# Altium PCB VYLT_IOT_BATTPACK.PcbDoc
Units mm, origin at the board's own origin, x right, y up, seen from the top; angles counter-clockwise.
Board outline 137.1 x 87.1 mm, 2 copper layers (L1, L2), stack 1.58 mm thick; 45 components, 30 nets, 165 pads, 54 vias.
Unrouted connection lines stored in the file: 6.
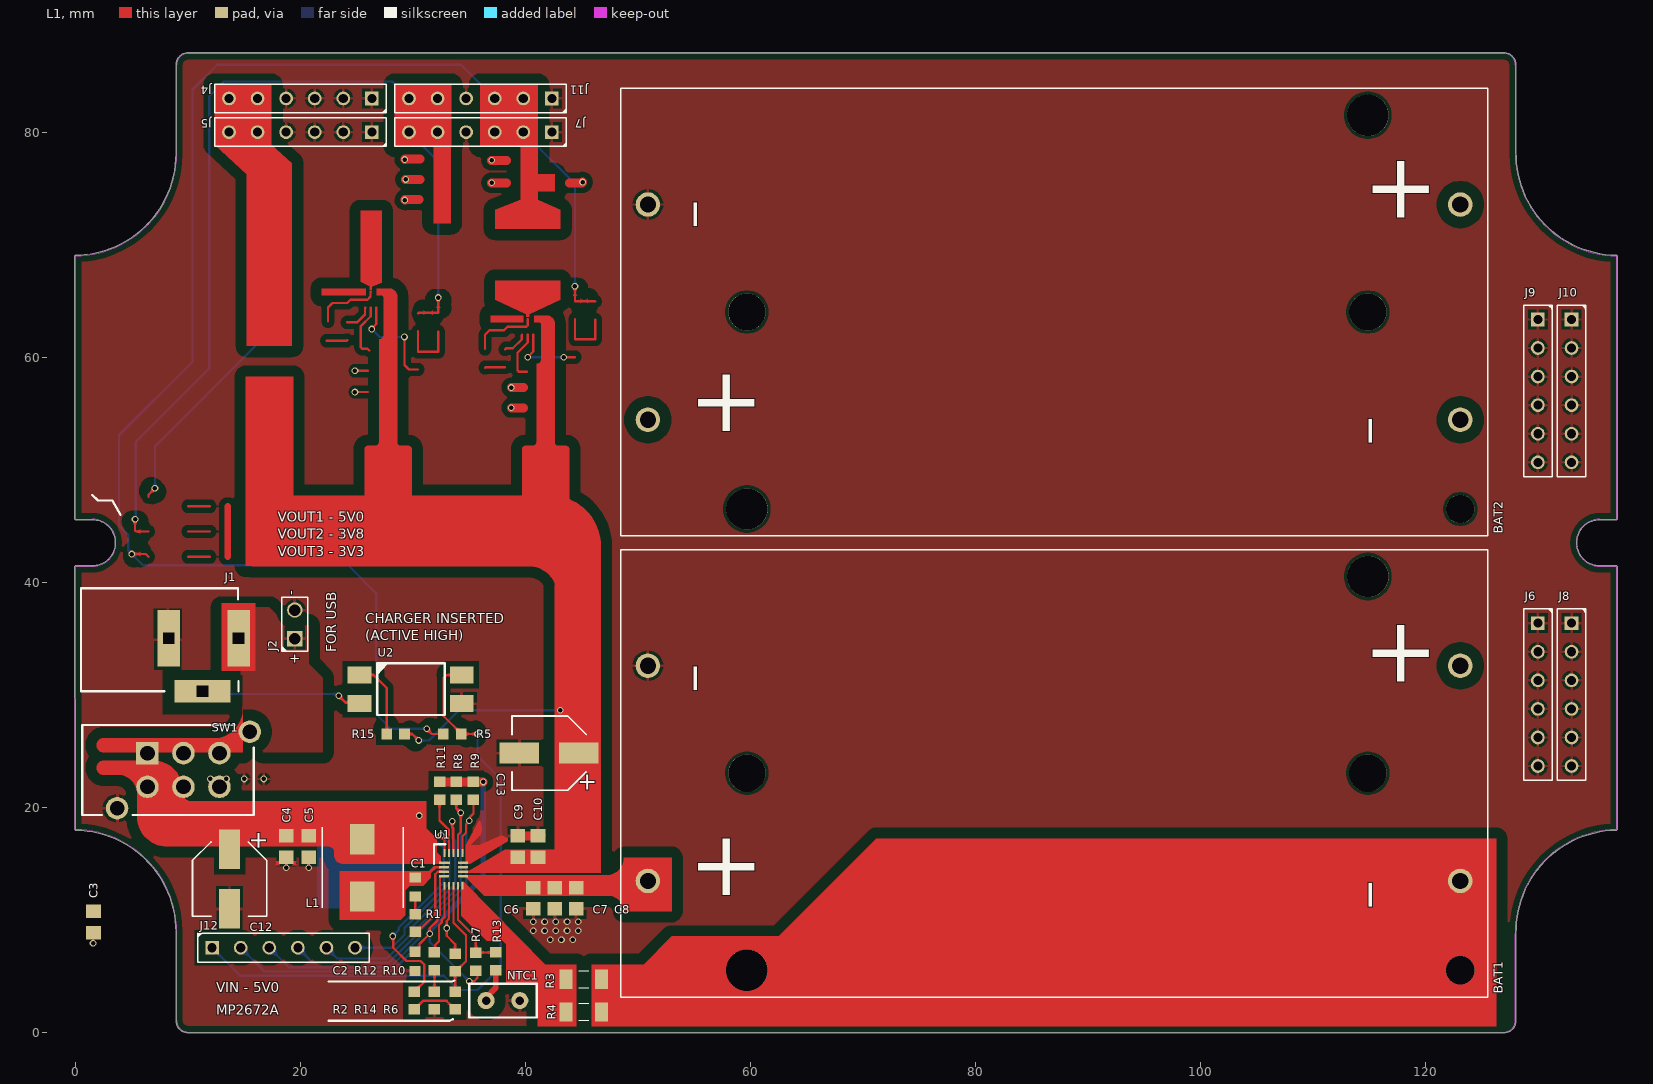
[diagram p0: L1 view]
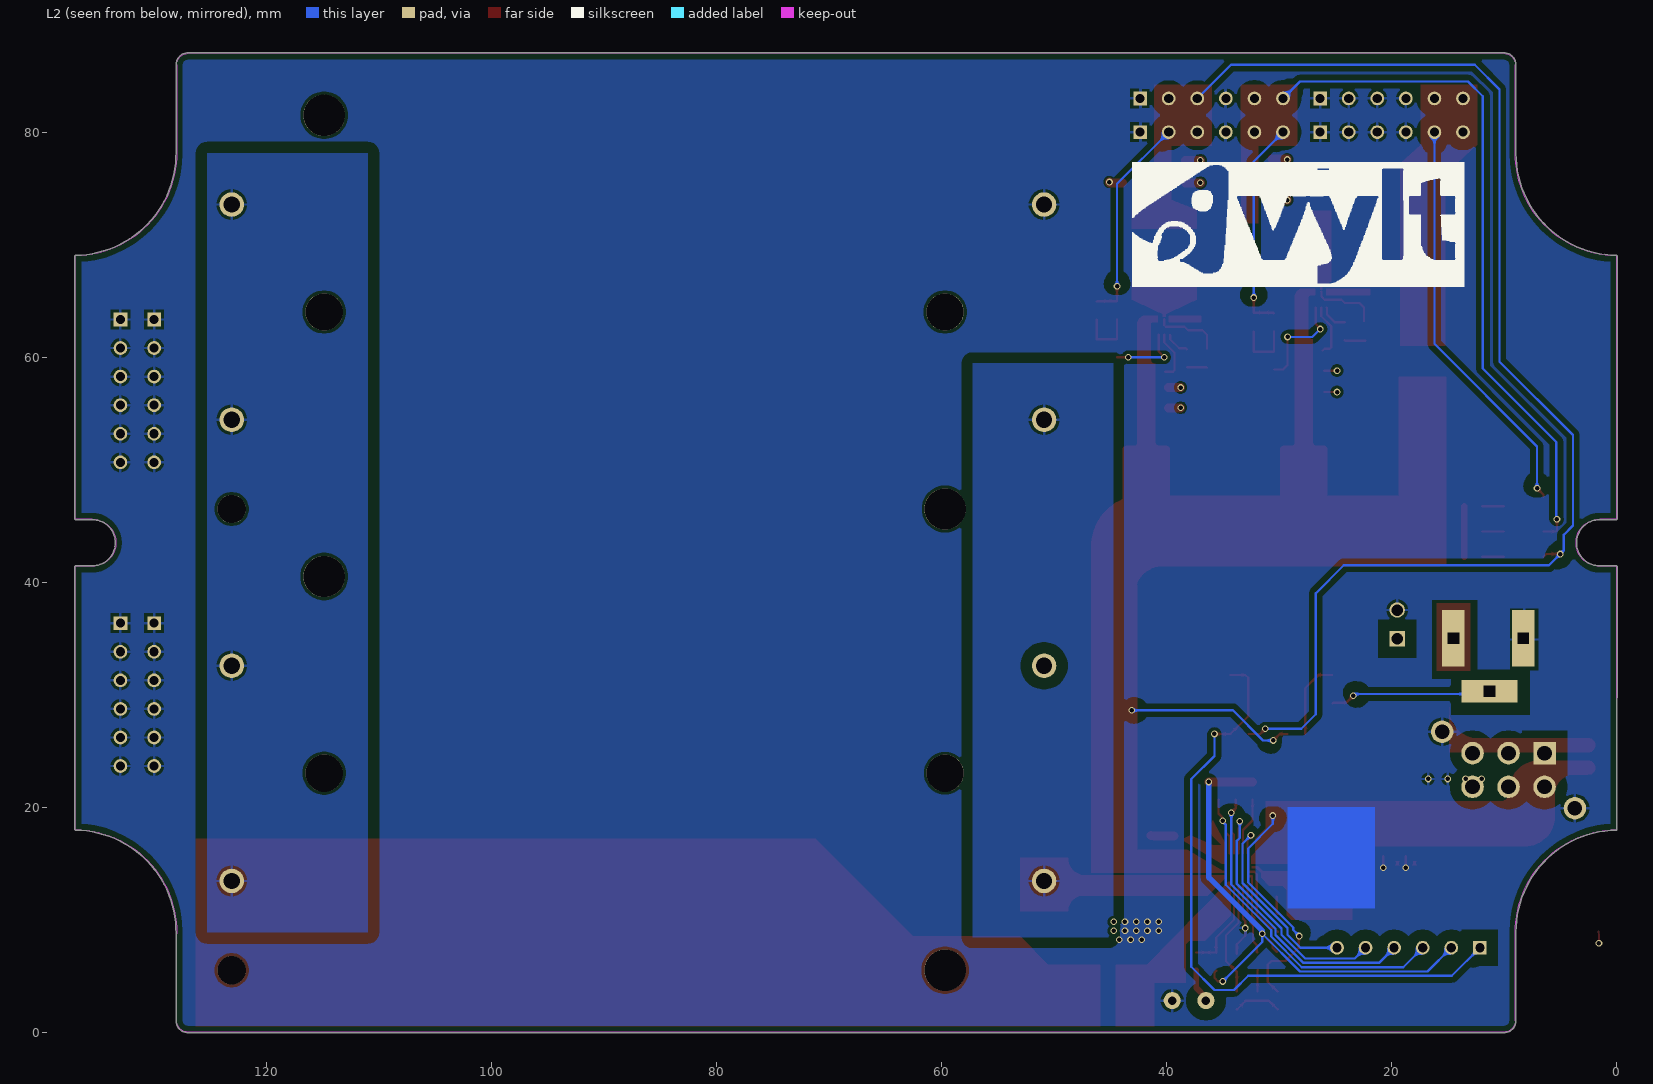
[diagram p1: L2 view, seen from below]
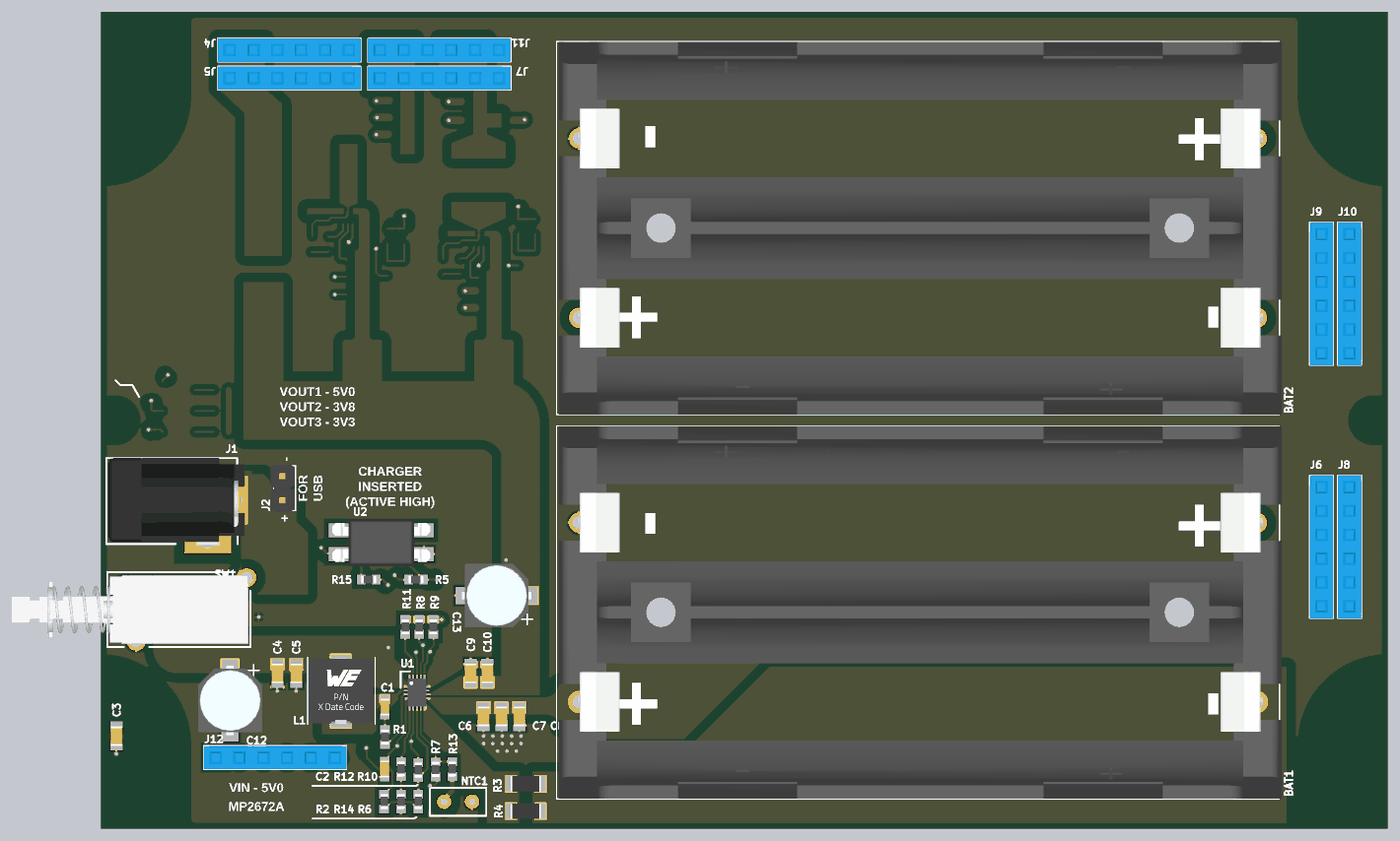
[diagram p2: 3D render of the assembled board from above, using the file's embedded part models]

## Layer stack, top to bottom
Top Solder: solder mask 0.01, Solder Resist, Dk 3.5
L1: signal copper 0.035
Dielectric 1: core 1.51, FR-4, Dk 4
L2: signal copper 0.035
Bottom Solder: solder mask 0.01, Solder Resist, Dk 3.5

## Board outline
-0.004,17.95 -0.05,41.4 0,41.45 1.5,41.45 ccw(c1.5,43.5) 3.55,43.5 ccw(c1.5,43.5) 1.5,45.55 0,45.55 -0.053,45.603 -0.053,69 -0.004,69.05 ccw(c-0.126,78.123) 8.947,78.124 8.947,78.247 8.947,85.997 8.95,86.014 cw(c10,86) 10,87.05 127,87.05 cw(c127,86) 128.05,86.014 128.053,85.997 128.054,78.247 ccw(c137.126,78.123) 137.003,69.051 137.05,68.983 137.05,45.6 137,45.55 135.5,45.55 ccw(c135.5,43.5) 135.5,41.45 137,41.45 137.05,41.4 137.05,18.017 137.004,17.95 ccw(c137.126,8.877) 128.053,8.754 128.053,1.003 128.05,0.986 cw(c127,1) 127,-0.05 10,-0.05 cw(c10,1) 8.95,0.986 8.947,1.003 8.947,8.753 8.947,8.877 ccw(c-0.126,8.877)

## Design rules (kind name [scope] priority, off if disabled: settings)
Clearance [All] p1: gap=0.254 ignorepadtopadclearanceinfootprint=FALSE except(0.178: Track-Track Track-SMDPad SMDPad-SMDPad; 0.5: Arc-Poly Track-Poly SMDPad-Poly; 1: THPad-Poly Poly-Poly Poly-Region)
Height [All] p1: minheight=0 maxheight=55 prefheight=12.7
PolygonConnect [All] p1: connectstyle=Relief reliefconductorwidth=0.254 reliefentries=4 polygonreliefangle="90 Angle" airgapwidth=0.254
RoutingVias [All] p1: holewidth=0.711 width=1.27 viastyle="Through Hole" minholewidth=0.1 minwidth=0.1 maxholewidth=0.711 maxwidth=1.27
SolderMaskExpansion [All] p1: expansion=0.102 istentingtop=FALSE
SupplyNets "Schematic Supply Nets_8" [InNet('5V0')] p1: voltage=0.000
SupplyNets "Schematic Supply Nets_12" [InNet('3V8')] p2: voltage=0.000
SupplyNets "Schematic Supply Nets_11" [InNet('PACK_P')] p3: voltage=0.000
SupplyNets "Schematic Supply Nets_7" [InNet('MP2672_LDO')] p4: voltage=0.000
SupplyNets "Schematic Supply Nets_5" [InNet('MP2672_VOUT')] p5: voltage=0.000
SupplyNets "Schematic Supply Nets_3" [InNet('3V3')] p6: voltage=0.000
SupplyNets "Schematic Supply Nets_2" [InNet('VCC')] p7: voltage=0.000
SupplyNets "Schematic Supply Nets" [InNet('VIN')] p8: voltage=0.000
SupplyNets "Schematic Supply Nets_1" [InNet('GND')] p9: voltage=0.000
Width [All] p1: maxlimit=5 minlimit=0.178 preferedwidth=0.5
29 further rules are at their usual default settings.

## Classes and differential pairs
net class J11_Nets: 3V3 3V8 GND
net class J7_Nets: 3V3 3V8 GND
net class J12_Nets: ADAP_DET_LV MP2672_LDO MP2672_NACK MP2672_NSTAT MP2672_SCL MP2672_SDA
net class J4_Nets: 5V0 GND
net class J10_Nets: GND
net class J9_Nets: GND
net class J5_Nets: 5V0 GND
net class J8_Nets: GND
net class J6_Nets: GND
net class C13_Nets: GND MP2672_VOUT
net class U2_Nets: ADAP_DET_HV ADAP_DET_LV GND NetR15_2
net class R15_Nets: MP2672_VOUT NetR15_2
net class R5_Nets: 3V3 ADAP_DET_LV
net class R2_Nets: NetR2_1 VCC
net class SW1_Nets: GND NetSW1_1 NetSW1_4 VCC VIN
net class J2_Nets: GND VIN
net class C3_Nets: GND VCC
net class J1_Nets: ADAP_DET_HV GND VIN
net class C12_Nets: GND VCC
net class U1_Nets: GND MP2672_LDO MP2672_NACK MP2672_NSTAT MP2672_SCL MP2672_SDA MP2672_VOUT NetC1_2 NetR1_2 NetR3_2 NetR6_1 NetR7_2 NetR11_2 NetR12_2 PACK_P VCC
net class R14_Nets: GND NetR12_1
net class R13_Nets: NetNTC1_2 NetR7_2
net class R12_Nets: NetR12_1 NetR12_2
net class R11_Nets: MP2672_LDO NetR11_2
net class R10_Nets: GND NetR6_1
net class R9_Nets: MP2672_LDO MP2672_SCL
net class R8_Nets: MP2672_LDO MP2672_SDA
net class R7_Nets: MP2672_LDO NetR7_2
net class R6_Nets: NetR2_1 NetR6_1
net class R4_Nets: NetR3_2 PACK_MID
net class R3_Nets: NetR3_2 PACK_MID
net class R1_Nets: NetC1_1 NetR1_2
net class NTC1_Nets: GND NetNTC1_2
net class L1_Nets: NetC1_2 VCC
net class C10_Nets: GND MP2672_VOUT
net class C9_Nets: GND MP2672_VOUT
net class C8_Nets: GND PACK_P
net class C7_Nets: GND PACK_P
net class C6_Nets: GND PACK_P
net class C5_Nets: GND VCC
net class C4_Nets: GND VCC
net class C2_Nets: GND MP2672_LDO
net class C1_Nets: NetC1_1 NetC1_2
net class BAT2_Nets: GND PACK_MID PACK_P
net class BAT1_Nets: GND PACK_MID PACK_P

## Components (designator, comment, footprint, x,y, rotation, side; value= is the part's Value field where it differs from the comment)
BAT1 "1049" 1049 87,23 r0 top locked
BAT2 "1049" 1049 87,64 r0 top locked
C1 "MLCC_0603" CAPC1608X10N 30.2,12.9 r90 top value=0.1uF
C2 "MLCC_0603" CAPC1608X10N 30.177,6.29 r270 top value=0.1uF
C3 "MLCC_0805" CAPC2012X13L 1.6,9.8 r270 top value=22uF
C4 "MLCC_0805" CAPC2012X13L 18.75,16.5 r270 top value=1uF
C5 "MLCC_0805" CAPC2012X13L 20.75,16.5 r270 top value=100nF
C6 "MLCC_0805" CAPC2012X13L 40.7,11.9 r270 top value=22uF
C7 "MLCC_0805" CAPC2012X13L 42.611,11.9 r270 top value=1uF
C8 "MLCC_0805" CAPC2012X13L 44.515,11.9 r270 top value=100nF
C9 "MLCC_0805" CAPC2012X13L 39.33,16.5 r90 top value=10uF
C10 "MLCC_0805" CAPC2012X13L 41.115,16.5 r90 top value=1uF
C12 "ERP_102-2" CAP_6.3_7.7 13.7,13.6 r270 top value=100uF
C13 "ERP_102-2" CAP_6.3_7.7 42.1,24.8 r180 top value=100uF
J1 "KLDX-0202-AC" KLDX-0202-AC 14.5,35 r0 top locked value=NA
J2 "2PX1R" 2PX1R 19.5,36.25 r90 top
J4 "ERP_148-2" 6PX1R_F 20,83 r0 top locked
J5 "ERP_148-2" 6PX1R_F 20,80 r0 top locked
J6 "ERP_148-2" 6PX1R_F 130,30 r90 top locked
J7 "ERP_148-2" 6PX1R_F 36,80 r0 top locked
J8 "ERP_148-2" 6PX1R_F 133,30 r90 top locked
J9 "ERP_148-2" 6PX1R_F 130,57 r90 top locked
J10 "ERP_148-2" 6PX1R_F 133,57 r90 top locked
J11 "ERP_148-2" 6PX1R_F 36,83 r0 top locked
J12 "ERP_148-2" 6PX1R_F 18.5,7.5 r180 top locked
L1 "IND_7040" IND_7040 25.501,14.606 r0 top value=1.5uH
NTC1 "RES_NTC_BEAD" RES_NTC_BEAD 39.5,2.8 r180 top value=10kNTC
R1 "ERP_101-1" RES_0603 30.2,9.7 r270 top value=0R
R2 "ERP_101-1" RES_0603 30.105,2.815 r90 top value=10R
R3 "ERP_101-1" RESC3115X06N 45.2,4.7 r180 top value=20R
R4 "ERP_101-1" RESC3115X06N 45.2,1.8 r180 top value=20R
R5 "ERP_101-1" RES_0603 33.5,26.5 r180 top value=1k
R6 "ERP_101-1" RES_0603 33.756,2.815 r270 top value=27k4
R7 "ERP_101-1" RES_0603 35.594,6.25 r90 top value=12k7
R8 "ERP_101-1" RES_0603 33.852,21.455 r270 top value=10k
R9 "ERP_101-1" RES_0603 35.349,21.455 r270 top value=10k
R10 "ERP_101-1" RES_0603 33.756,6.18 r270 top value=10k
R11 "ERP_101-1" RES_0603 32.365,21.455 r270 top value=1k
R12 "ERP_101-1" RES_0603 31.913,6.29 r90 top value=6k04
R13 "ERP_101-1" RES_0603 37.368,6.29 r90 top value=3k74
R14 "ERP_101-1" RES_0603 31.913,2.815 r90 top value=6k04
R15 "ERP_101-1" RES_0603 28.46,26.5 r180 top value=220R
SW1 "ERP_110-4" PBH2U 9.6,23.3 r270 top
U1 "MP2672AGD" MP2672AGD 33.615,14.455 r0 top locked
U2 "FOD817A3SD" FOD817A3SD 29.8,30.48 r0 top

## Footprints (in the part's own frame and the unit in brackets; to place one, negate y for a bottom-side part, rotate by r counter-clockwise, add the part's x,y. Pads: shape width x height; smd on the part's side, far side on the other; paste and mask are expansions set on the pad)
2PX1R [mm]
  rect 1.37x1.37 hole 1.02: 1(-1.27,0)
  round 1.37 hole 1.02: 2(1.27,0)
  silkscreen extent -2.39,-1.17 2.39,1.17, body extent -2.54,-1.04 2.54,1.5, height 8.77
6PX1R_F [mm]
  rect 1.22x1.22 / inner round 1.22 / far side rect 1.22x1.22 hole 0.81: 1(6.35,0)
  round 1.22 hole 0.81: 2(3.81,0) 3(1.27,0) 4(-1.27,0) 5(-3.81,0) 6(-6.35,0)
  silkscreen extent -7.62,-1.27 7.62,1.27, body extent -7.62,-1.27 7.62,1.27, height 8.51
1049 [mm] "BATT HOLDER 18650 2 CELL PC PIN"
  round 2.175 hole 1.45: 1(-36.11,9.565) 2(36.11,9.565) 3(-36.11,-9.565) 4(36.11,-9.565)
  round 3.68 hole 3.68 unplated: ""(-27.31,-17.5) ""(27.89,17.5)
  round 3.31 hole 3.31 unplated: ""(-27.31,0.015) ""(27.89,0.015)
  round 2.51 hole 2.51 unplated: ""(36.11,-17.5)
  silkscreen extent -38.53,-19.89 38.53,19.89, body extent -38.3,-19.88 38.76,19.89, height 14.91
CAP_6.3_7.7 [mm]
  rect 3.5x1.85 smd: 1(-2.65,0) 2(2.65,0)
  silkscreen extent -3.3,-3.3 3.3,3.3, body extent -3.7,-3.4 3.7,3.4, height 8
CAPC1608X10N [mm] "Chip Capacitor, 2-Leads, Body 1.60x0.80mm, IPC Medium Density"
  rect 0.9x1 smd: 1(-0.85,0) 2(0.85,0)
  body extent -0.9,-0.5 0.9,0.5, height 1
CAPC2012X13L [mm] "Chip Capacitor, 2-Leads, Body 2.00x1.25mm, IPC High Density"
  rect 1.2x1.3 smd: 1(-0.95,0) 2(0.95,0)
  body extent -1.05,-0.63 1.05,0.63, height 1.26
FOD817A3SD [mm]
  rect 2.1x1.5 smd: 1(-4.55,1.27) 2(-4.55,-1.27) 3(4.55,-1.27) 4(4.55,1.27)
  silkscreen extent -3,-2.3 3.03,2.3, body extent -5.23,-2.57 5.23,2.53, height 3.84
IND_7040 [mm]
  rect 2.2x2.7 smd: 1(0,2.55) 2(0,-2.55)
  silkscreen extent -3.55,-3.55 3.65,3.6, body extent -3.45,-3.5 3.45,3.5, height 4
KLDX-0202-AC [mm] "CONN PWR JACK 2X5.5MM KINKED PIN"
  rect 2x5 hole 1 square: 1(0,0) 2(-6.2,0)
  rect 5x2 hole 1 square: 3(-3.2,-4.7)
  silkscreen extent -14,-4.7 0,4.45, body extent -13.75,-5 0.75,4.5, height 10.85
MP2672AGD [mm]
  rect 1x0.2 smd: 1(-0.8,0.6)
  rect 0.9x0.2 smd: 2(-0.85,0.2) 3(-0.85,-0.2) 4(-0.85,-0.6) 10(0.85,-0.6) 11(0.85,-0.2) 12(0.85,0.2) 13(0.85,0.6)
  rect 0.2x0.7 smd: 5(-0.8,-1.45) 6(-0.4,-1.45) 7(0,-1.45) 8(0.4,-1.45) 9(0.8,-1.45) 14(0.8,1.45) 15(0.4,1.45) 16(0,1.45) 17(-0.4,1.45) 18(-0.8,1.45)
  silkscreen extent -1.75,0.5 -0.75,2.25, body extent -1,-1.5 1,1.5, height 0.87
PBH2U [mm]
  rect 2x2 hole 1.3: 1(-1.5,-3.2)
  round 2 hole 1.3: 2(-1.5,0) 3(-1.5,3.2) 4(1.5,-3.2) 5(1.5,0) 6(1.5,3.2) 7(3.4,-5.9) 8(-3.4,5.9)
  silkscreen extent -4,-9 4,6.25, body extent -3.65,-19.2 3.65,6, height 9.15
RES_0603 [mm]
  rect 0.94x1.02 smd: 1(-0.79,0) 2(0.79,0)
  body extent -0.8,-0.4 0.8,0.4, height 0.45
RES_NTC_BEAD [mil] "THERMISTOR NTC"
  round 60 hole 30: 1(0,0) 2(118.11,0)
  silkscreen extent -59,-59 177,59
RESC3115X06N [mm] "Chip Resistor, 2-Leads, Body 3.10x1.55mm, IPC Medium Density"
  rect 1.15x1.7 smd: 1(-1.575,0) 2(1.575,0)
  silkscreen extent -0.45,-0.75 0.45,0.75, body extent -1.6,-0.82 1.6,0.82, height 0.65

## Part data
BAT1 BAT2: "BATT HOLDER 18650 2 CELL PC PIN", Manufacturer 1="Keystone Electronics", Manufacturer Part Number 1=1049
C1 C2: "Chip Capacitor, 2-Leads, Body 1.60x0.80mm, IPC Medium Density", Package=0603
C3 C4 C5 C6 C7 C8 C9 C10: "Chip Capacitor, 2-Leads, Body 2.00x1.25mm, IPC High Density", Package=0805
C12 C13: library part CAP_6.3_7.7, "Electrolytic Capacitor SMD 6.3x7.7", Package=6.3x7.7, ERP=1
J1: "CONN PWR JACK 2X5.5MM KINKED PIN", Manufacturer 1=Sharvi, Manufacturer Part Number 1=ST2001CO0701
J4 J5 J6 J7 J8 J9 J10 J11 J12: library part 6PX1R_F, "6PX1R Female Header"
L1: Manufacturer 1="Würth Elektronik", Manufacturer Part Number 1=744311150
NTC1: "THERMISTOR NTC", Manufacturer 1="Eaton - Electronics Division", Manufacturer Part Number 1=NRG1104F3435B2F
R1 R2 R5 R6 R7 R8 R9 R10 R11 R12 R13 R14 R15: library part RES_0603, "RES_0603", Package=0603
R3 R4: library part RES_1206, "RES_0805", Package=1206
SW1: library part PBH2U, "Pushbutton Switch DPDT Standard Through Hole, Right Angle", Manufacturer 1=Sharvi, Manufacturer Part Number 1=ST2106CO3161
U1: "2-CELL 2A BOOST CHARGER WITH NVD", Manufacturer 1="Monolithic Power Systems Inc."
U2: "OPTOISOLATOR 5KV TRANSISTOR 4SMD"

## Via types
v1: diameter 0.6, hole 0.4, L1 to L2, tented both sides, 54 vias

## Nets (pads, with @x,y where several pads share a name; then routed paths per layer and width w, separated by ;. In a path a pad name is that pad's centre, name@x,y a point inside that pad or via, vN(x,y) a via of type N, cw(c..) or ccw(c..) an arc to the next point about the centre after c; other vN are vias at no path point)
3V3: J7.2 J7.3 J11.2 J11.3 R5.2 | length 134.5
  L1 w0.203: v1(5,42.5) 6.25,42.5 6.5,42.25 ; v1(31.22,26.971) 31.22,26.957 31.677,26.5 R5.2 ; v1(44.4,66.3) 44.4,64.98 46.17,64.98 46.2,64.95
  L2 w0.203: v1(31.22,26.971) 28.029,26.971 26.75,28.25 26.75,39 24.25,41.5 6,41.5 v1(5,42.5) 5,42.517 4.7,42.817 4.7,44.2 3.875,45.025 3.875,53.075 10.4,59.6 10.4,83.8 12.6,86 34.27,86 J11.3 ; J7.2 44.4,75.41 v1(44.4,66.3)
3V8: J7.5 J7.6 J11.5 J11.6 | length 80.6
  L1 w0.203: v1(5.3,45.6) 5.3,44.6 5.4,44.5 6.5,44.5 ; 30.45,63.88 30.52,63.95 32.25,63.95 v1(32.25,65.3) v1@32.15,65.4
  L2 w0.203: v1(5.3,45.6) 5.354,45.654 5.354,52.454 11.9,59 11.9,83.2 13.2,84.5 28.15,84.5 J11.6 ; J7.6 32.25,77.4 v1(32.25,65.3)
5V0: J4.5 J4.6 J5.5 J5.6 | length 36.4
  L1 w0.203: 6.5,47.6 6.5,47.768 v1(7.067,48.335)
  L2 w0.203: v1(7.067,48.335) 7.067,52.067 16.19,61.19 J5.5
ADAP_DET_HV: J1.3 U2.2 | length 14.3
  L1 w0.203: v1(23.4,29.9) 24.012,29.288 25.172,29.288 U2.2
  L2 w0.203: J1.3@11.3,30.05 23.143,30.05 23.293,29.9 v1(23.4,29.9)
ADAP_DET_LV: J12.1 R5.1 U2.4 | length 58.4
  L1 w0.203: U2.4 33,31.75 32.75,31.5 32.75,28.08 34.29,26.54 R5.1 v1(35.75,26.5)
  L2 w0.203: J12.1 14.64,5.01 32.74,5.01 34,3.75 35.75,3.75 37.8,5.8 37.8,22.5 35.75,24.55 v1(35.75,26.5)
GND: BAT1.1 BAT2.1 C2.2 C3.2 C4.2 C5.2 C6.2 C7.2 C8.2 C9.2 C10.2 C12.2 C13.2 J1.2 J2.2 J4.1 J4.2 J4.3 J4.4 J5.1 J5.2 J5.3 J5.4 J6.1 J6.2 J6.3 J6.4 J6.5 J6.6 J7.1 J7.4 J8.1 J8.2 J8.3 J8.4 J8.5 J8.6 J9.1 J9.2 J9.3 J9.4 J9.5 J9.6 J10.1 J10.2 J10.3 J10.4 J10.5 J10.6 J11.1 J11.4 NTC1.1 R10.1 R14.1 SW1.7 SW1.8 U1.6 U1.13 U2.3 | length 11.6
  L1 w0.203: v1(1.567,7.906) 1.567,8.602 C3.2@1.6,8.95 ; v1(18.731,14.606) 18.731,15.302 C4.2@18.75,15.65 ; v1(20.745,14.606) 20.745,15.302 C5.2@20.75,15.65 ; U1.6 33.215,12.111 33.209,12.105 33.209,10.092 33,9.884 33,8.557 33.75,7.807 33.75,7.363 33.756,7.357 R10.1
  L1 w0.8: C9.2 39.58,17.45 40.865,17.45 C10.2 C10.2@41.365,17.466
  other v1: 42.2,8.2 43.2,8.2 44.2,8.2 40.7,9 41.7,9 42.7,9 43.7,9 44.7,9 33,9.25 40.7,9.8 41.7,9.8 42.7,9.8 43.7,9.8 44.7,9.8 15,22.5 16.75,22.5
MP2672_LDO: C2.1 J12.2 R7.1 R8.1 R9.1 R11.1 U1.4 | length 53.7
  L1 w0.203: C2.1 30.227,7.14 30.576,7.488 30.576,7.826 v1(31.5,8.75) 31.5,9.25 32.177,9.927 32.177,10.138 32.416,10.378 32.416,13.854 32.418,13.855 U1.4 ; v1(35,4.5) 35.028,4.528 35.354,4.528 ; 35.354,4.53 35.456,4.53 35.75,4.824 35.75,5.304 R7.1
  L1 w0.8: R11.1 R8.1 R9.1 35.356,22.238 v1(36.246,22.238)
  L2 w0.203: J12.2 16.799,5.391 28.141,5.391 v1(31.5,8.75) 31.5,8 v1(35,4.5)
  L2 w0.5: v1(31.5,8.75) 31.519,8.769 31.519,9.019 36.246,13.746 v1(36.246,22.238)
MP2672_NACK: J12.6 U1.18 | length 17.4
  L1 w0.203: v1(32.5,17.5) 32.5,17.393 32.815,17.078 U1.18
  L2 w0.203: J12.6 28.095,7.5 29.25,8.655 29.25,9.25 33.25,13.25 33.25,16.75 v1(32.5,17.5)
MP2672_NSTAT: J12.5 U1.16 | length 23.5
  L1 w0.203: v1(33.5,18.75) 33.5,18.222 33.596,18.126 33.596,16.233 33.613,16.215 33.613,15.907 U1.16
  L2 w0.203: J12.5 23.276,6.534 27.668,6.534 29.79,8.657 29.79,9.21 33.75,13.169 33.75,17 33.5,17.25 v1(33.5,18.75)
MP2672_SCL: J12.3 R9.2 U1.14 | length 32.5
  L1 w0.203: U1.14 34.415,17.409 34.718,17.712 34.718,18.48 34.999,18.762 v1(34.999,18.798) 35.075,18.874 35.075,19.124 35.376,19.425 35.376,20.637 R9.2
  L2 w0.203: J12.3 18.958,5.772 27.984,5.772 30.704,8.493 30.704,9.046 34.75,13.092 34.75,18.433 35,18.683 v1@35,18.75
MP2672_SDA: J12.4 R8.2 U1.15 | length 29.6
  L1 w0.203: R8.2 33.852,19.898 v1(34.25,19.5) 34.25,17.783 34.015,17.548 U1.15
  L2 w0.203: J12.4 21.117,6.153 27.826,6.153 30.31,8.637 30.31,9.19 34.25,13.131 v1(34.25,19.5)
MP2672_VOUT: C9.1 C10.1 C13.1 R15.1 U1.11 | length 15.2
  L1 w0.203: R15.1 29.95,26.5 v1(30.525,25.925)
  L2 w0.203: v1(30.525,25.925) 31.425,25.925 34.1,28.6 v1(43.1,28.6)
NetC1_1: C1.1 R1.1 | length 1.6
  L1 w0.203: R1.1@30.115,10.495 30.2,10.581 C1.1
NetC1_2: C1.2 L1.2 U1.2 U1.12
NetNTC1_2: NTC1.2 R13.1 | length 3.1
  L1 w0.5: NTC1.2 36.5,3.077 37.368,3.945 R13.1
NetR1_2: R1.2 U1.3 | length 6.9
  L1 w0.203: R1.2@30.115,8.915 30.467,9.267 30.767,9.267 31.986,10.486 31.986,14.026 32.215,14.255 U1.3
NetR2_1: R2.1 R6.2 | length 4.3
  L1 w0.203: R2.1 30.145,2.025 30.894,2.774 33,2.774 33,2.741 33.716,2.025 R6.2
NetR3_2: R3.2 R4.2 U1.9
NetR6_1: R6.1 R10.2 U1.7 | length 10.2
  L1 w0.203: U1.7 33.615,9.71 34.711,8.614 34.711,6.304 R10.2@33.796,5.39 ; R6.1 R10.2@33.756,5.37
NetR7_2: R7.2 R13.2 U1.8 | length 8.4
  L1 w0.203: U1.8 34.015,9.985 35.594,8.406 R7.2 35.634,7.08 R13.2
NetR11_2: R11.2 U1.17 | length 5.1
  L1 w0.203: R11.2 32.365,18.819 33.215,17.969 U1.17
NetR12_1: R12.1 R14.2 | length 1.9
  L1 w0.203: R12.1@31.901,5.512 R12.1 R14.2
NetR12_2: R12.2 U1.5 | length 6.3
  L1 w0.203: R12.2 31.986,7.153 31.986,7.736 32.325,8.075 32.325,9.502 32.558,9.735 32.558,9.98 32.815,10.237 U1.5
NetR15_2: R15.2 U2.1 | length 7
  L1 w0.203: U2.1 26.5,31.75 27.67,30.58 R15.2
NetSW1_1: SW1.1
NetSW1_4: SW1.4
PACK_MID: BAT1.2 BAT1.4 BAT2.2 BAT2.4 R3.1 R4.1
PACK_P: BAT1.3 BAT2.3 C6.1 C7.1 C8.1 U1.10 | length 0.1
  L1 w0.9: C8.1@44.465,12.75 C8.1@44.515,12.75
VCC: C3.1 C4.1 C5.1 C12.1 L1.1 R2.2 SW1.2 SW1.5 U1.1 | length 20.7
  L1 w0.203: v1(28.209,8.541) 28.25,8.5 28.25,7.5 29.432,6.318 30.682,6.318 31,6 31,4.46 30.145,3.605 R2.2
  L2 w0.203: v1(28.209,8.541) 28.75,9.082 28.75,9.289 32.75,13.289 32.75,16.323 30.554,18.519 v1(30.554,19.25)
VIN: J1.1 J2.1 SW1.3 SW1.6
  other v1: 12,22.5 13.424,22.5
pads on no net: BAT1. BAT2.
copper on no net: | length 78.5
  L1 w0.203: 10,42.25 11.96,42.25 ; 10,44.5 11.96,44.5 ; 10,46.75 11.96,46.75 ; 22.35,61.45 24.09,61.45 24.15,61.51 ; 22.456,63.162 22.456,64.412 22.856,64.812 24.156,64.812 24.456,65.112 25.959,65.112 26.233,65.386 26.233,65.789 26.256,65.812 ; 24.15,63.09 25.04,63.09 25.745,63.795 25.745,64.395 25.75,64.4 ; v1(24.85,56.9) 26,56.9 ; v1(24.85,58.8) 26,58.8 ; 26.11,60.6 25.964,60.746 25.504,60.746 25.373,60.877 25.373,62.766 26.25,63.643 26.25,64.4 ; v1(26.35,62.5) 26.35,62.555 26.75,62.955 26.75,64.4 ; v1(29.25,61.8) 29.25,59.3 29.64,58.91 30.45,58.91 ; 30.45,62.3 30.45,60.49 32.25,60.49 32.25,62.25 ; 36.4,59.05 36.46,59.11 38.186,59.11 ; 36.4,60.75 36.4,62 36.8,62.4 38.1,62.4 38.4,62.7 40.081,62.7 40.2,62.819 40.2,63.4 ; 38.186,60.69 38.278,60.782 38.882,60.782 39.677,61.577 39.677,61.977 39.7,62 ; 39.85,55.5 39.95,55.5 ; 39.85,57.3 39.95,57.3 ; 40.11,58.7 39.419,58.7 39.3,58.819 39.3,60.4 40.2,61.3 40.2,62 ; v1(40.2,60) 40.7,60.5 40.7,62 ; v1(43.4,60) 44.39,60 44.4,60.01 ; 44.4,63.4 44.4,61.59 46.2,61.59 46.2,63.35
  L1 w0.6: 13.54,42.25 13.54,44.5 13.54,46.75
  L1 w0.8: v1(29.283,73.969) cw(c29.314,73.969) 29.314,74 30.55,74 ; v1(29.283,77.569) cw(c29.314,77.569) 29.314,77.6 30.65,77.6 ; v1(29.352,75.8) 30.65,75.8 ; v1(37,75.5) 38.3,75.5 ; v1(37,77.5) 38.3,77.5 ; v1(38.75,55.5) 39.85,55.5 ; v1(38.75,57.3) 39.85,57.3 ; 43.9,75.5 45.014,75.5 ccw(c45.014,75.569) v1(45.083,75.569)
  L2 w0.203: v1(26.35,62.5) 27.05,61.8 v1(29.25,61.8) ; v1(40.2,60) v1(43.4,60)

## Polygon pours and split planes (outlines as drawn)
GND on L2 "NONET_L-01_P-001" (solid, pour order 92): -0.133,18.016 -0.133,41.399 -0.083,41.45 1.417,41.45 ccw(c1.417,43.499) 3.467,43.499 ccw(c1.417,43.499) 1.417,45.549 -0.083,45.549 -0.136,45.602 -0.136,68.999 -0.087,69.05 ccw(c-0.21,78.123) 8.864,78.123 8.864,78.246 8.864,85.996 8.867,86.014 cw(c9.917,85.999) 9.917,87.05 126.917,87.05 cw(c126.917,85.999) 127.967,86.014 127.97,85.996 127.971,78.246 127.971,78.245 ccw(c137.043,78.122) 136.92,69.05 136.967,68.982 136.967,45.599 136.917,45.549 135.417,45.549 135.416,45.549 ccw(c135.417,43.499) 135.417,41.45 136.917,41.45 136.967,41.399 136.967,18.016 136.921,17.949 ccw(c137.043,8.876) 127.97,8.753 127.97,8.752 127.97,1.002 127.967,0.985 cw(c126.917,0.999) 126.917,-0.051 9.917,-0.051 cw(c9.917,0.999) 8.867,0.985 8.864,1.002 8.864,8.752 8.864,8.876 ccw(c-0.21,8.876)
PACK_P on L2 "NONET_L-01_P-001" (solid, remove dead copper, pour order 78): 44.75,59.445 57.25,59.445 57.25,8.445 44.75,8.445
PACK_MID on L2 "NONET_L-01_P-001" (solid, remove dead copper, pour order 80): 111,78.124 125.3,78.124 125.3,8.877 111,8.877
GND on L1 "NONET_L-01_P-001" (solid, remove dead copper, pour order 94): -0.133,18.016 -0.133,41.399 -0.083,41.45 1.417,41.45 ccw(c1.417,43.499) 3.467,43.499 ccw(c1.417,43.499) 1.417,45.549 -0.083,45.549 -0.136,45.602 -0.136,68.999 -0.087,69.05 ccw(c-0.21,78.123) 8.864,78.123 8.864,78.246 8.864,85.996 8.867,86.014 cw(c9.917,85.999) 9.917,87.05 126.917,87.05 cw(c126.917,85.999) 127.967,86.014 127.97,85.996 127.971,78.246 127.971,78.245 ccw(c137.043,78.122) 136.92,69.05 136.967,68.982 136.967,45.599 136.917,45.549 135.417,45.549 135.416,45.549 ccw(c135.417,43.499) 135.417,41.45 136.917,41.45 136.967,41.399 136.967,18.016 136.921,17.949 ccw(c137.043,8.876) 127.97,8.753 127.97,8.752 127.97,1.002 127.967,0.985 cw(c126.917,0.999) 126.917,-0.051 9.917,-0.051 cw(c9.917,0.999) 8.867,0.985 8.864,1.002 8.864,8.752 8.864,8.876 ccw(c-0.21,8.876)
VIN on L1 "NONET_L-01_P-001" (solid, remove dead copper, pour order 93): 14.875,24.875 22,24.875 22,31.5 20.75,32.75 20.75,36.5 18.5,36.5 17.25,37.75 13,37.75 13,31.75 14.875,31.75 14.875,26.125

## Keep-outs
Keep-Out Layer:
  lines w0.1: -0.003,18 cw(c-0.126,8.877) 8.997,8.753 8.997,1.003 ; -0.003,45.603 -0.003,69 ccw(c-0.126,78.124) 8.997,78.247 8.997,85.997 ; 0,18.003 0,41.4 1.5,41.4 ccw(c1.5,43.5) 1.5,45.6 0,45.6 ; 9,1 ccw(c10,1) 10,0 127,0 ccw(c127,1) 128,1 ; 9,86 cw(c10,86) 10,87 127,87 cw(c127,86) 128,86 ; 128.003,1.003 128.003,8.753 cw(c137.126,8.877) 137.003,18 ; 128.003,85.997 128.003,78.247 ccw(c137.126,78.123) 137.003,69 ; 137,18.003 137,41.4 135.5,41.4 cw(c135.5,43.5) 135.5,45.6 137,45.6 137,68.998 ; 137.003,69 137.003,69

## Other copper
L1:
  region net VCC: 24.25,14.958 23.792,14.958 cw(c23.792,15.75) 23,15.75 23,16 ccw(c22.5,16) 22.5,16.5 24.25,16.5
  region net VCC: 9.5,21.125 9.5,21.585 ccw(c6.96,21.585) 6.96,24.125 2.5,24.125 ccw(c2.5,23.5) 1.875,23.5 ccw(c2.5,23.5) 2.5,22.875 3.75,22.875 cw(c3.75,21.125) 5.5,21.125
  region net VCC: 11.75,20.5 10.355,20.5 cw(c10.355,21.355) 9.5,21.355 9.5,16.5 11.75,16.5
  region net VCC: 9.5,16.5 8.14,16.5 cw(c8.14,19.14) 5.5,19.14 5.5,19.75 cw(c6.25,19.75) 6.25,20.5 9.75,20.5
  region net GND: 34.7,16.6 35.874,18.823 cw(c35.328,18.278) 36.1,18.278 36.1,17.9 cw(c35.376,17.9) 35.888,17.388 35.1,16.6
  region net PACK_P: 48.75,10.75 ccw(c47.384,10.75) 47.384,12.116 48.75,12.116
  region net PACK_P: 48.75,15.5 cw(c47.195,15.5) 47.195,13.945 48.75,13.945
  region net MP2672_VOUT: 27,61.588 ccw(c27,61.988) 27.4,61.988 27.4,61.588
  region net MP2672_VOUT: 41,59.4 ccw(c41,59.8) 41.4,59.8 41.4,59.4
  region net MP2672_VOUT: 28.6,61.588 28.6,52.411 ccw(c28.9,52.411) 28.9,52.111 29.6,52.111 cw(c29.6,51.811) 29.9,51.811 29.9,46.211 25.8,46.211 ccw(c25.8,46.111) 25.7,46.111 25.7,51.811 cw(c26,51.811) 26,52.111 26.6,52.111 ccw(c26.6,52.511) 27,52.511 27,61.588
  region net MP2672_VOUT: 42.6,59.4 42.6,52.411 ccw(c42.9,52.411) 42.9,52.111 43.6,52.111 cw(c43.6,51.811) 43.9,51.811 43.9,46.211 39.8,46.211 ccw(c39.8,46.111) 39.7,46.111 39.7,51.811 cw(c40,51.811) 40,52.111 40.6,52.111 ccw(c40.6,52.511) 41,52.511 41,59.4
  region net MP2672_VOUT: 40.8,63.7 41.9,63.7 cw(c41.9,63) 42.6,63 42.6,58.2 41.4,58.2 41.4,62.9 ccw(c41.2,62.9) 41.2,63.1 40.8,63.1
  region net MP2672_VOUT: 26.8,66.1 27.9,66.1 cw(c27.9,65.4) 28.6,65.4 28.6,60.6 27.4,60.6 27.4,65.3 ccw(c27.2,65.3) 27.2,65.5 26.8,65.5
  region net MP2672_VOUT: 46.7,43.198 ccw(c42.2,43.2) 42.2,47.7 15.7,47.7 15.7,41.4 40.497,41.4 cw(c40.325,38.901) 42.672,39.776 46.7,39.776
  region net VIN: 14.875,24.875 2.5,24.875 cw(c2.5,25.5) 1.875,25.5 cw(c2.5,25.5) 2.5,26.125 12.335,26.125 ccw(c12.335,28.665) 14.875,28.665 14.875,28.937
  region net NetC1_2: 32.449,14.753 31.853,14.753 31.4,14.3 23.5,14.3 23.5,10 28.9,10 29.3,10.4 29.3,12.6 29.7,13 30.9,13 31.6,13.7 31.6,14.1 32.057,14.557 32.449,14.557
  region net NetC1_2: 23.5,10 23.5,14 28.3,14 28.3,10
  region net VCC: 11.75,16.5 27.5,16.5 27.5,20.5 11.75,20.5
  region net VCC: 9.5,21.125 9.5,19 5.5,19 5.5,21.125
  region net VCC: 32.1,16 32.1,17.2 31.2,18.1 31.2,16.3 31.5,16
  region net VCC: 24.25,15.742 24.25,14.958 31.742,14.958 32.49,14.958 32.49,15.61 32.1,16 31.5,16
  region net VCC: 24.25,15.7 24.25,20.5 31.2,20.5 31.2,16.3 31.8,15.7
  region net GND: 35.1,14.957 38.426,16.974 38.426,17.214 37.9,17.5 35.3,16.4
  region net GND: 34.7,14.957 35.1,14.957 36.01,16.6 34.7,16.6
  region net NetR3_2: 44.5,6 41.769,6 34.52,13.355 34.313,13.355 34.313,10.359 36.572,8.1 38,8.1 38.3,7.8 38.3,4.4 41.1,4.4 41.1,0.5 44.5,0.5
  region net PACK_P: 42.1,13.954 34.7,13.954 34.7,13.757 36.341,12.116 42.1,12.116
  region net PACK_MID: 45.9,6 45.9,0.5 126.3,0.5 126.3,17.2 71.2,17.2 62.5,8.5 53,8.5 50.5,6
  region net MP2672_VOUT: 34.867,14.155 34.867,14.355 35,14.355 35,14.155
  region net PACK_P: 42.1,13.945 48.75,13.945 48.75,15.5 53,15.5 53,10.75 48.75,10.75 48.75,12.116 42.1,12.116
  region net MP2672_VOUT: 35,14.155 38.151,14.155 38.151,16.2 35,14.355
  region net MP2672_VOUT: 46.7,25.55 46.7,14.155 38.151,14.155 38.151,16.205 42.6,16.205 42.6,25.55
  region net 3V3: 42.6,76.25 39.75,76.25 39.75,74.75 42.6,74.75
  region net 3V8: 33.35,71.9 31.85,71.9 31.85,79.5 33.35,79.5
  region: 25.35,73 27.25,73 27.25,66.612 26.352,66.276 26.352,66 26.15,66 26.15,66.286 25.35,66.7
  region net MP2672_VOUT: 42.6,31.7 42.6,39.776 46.7,39.776 46.7,31.7
  region net MP2672_VOUT: 42.6,23.3 46.7,23.3 46.7,31.7 42.6,31.7
  region net 3V3: 36,78.8 36,84.2 41.1,84.2 41.1,78.8
  region net MP2672_VOUT: 19.375,58.25 19.375,41.45 15.125,41.45 15.125,58.25
  region net 5V0: 19.25,61 19.25,77.25 17.4,78.893 17.4,84.2 12.4,84.2 12.4,78.893 15.25,76.25 15.25,61
  region: 25.8,66.1 25.8,65.5 21.9,65.5 21.9,66.1
  region: 39.8,63.7 39.8,63.1 36.9,63.1 36.9,63.7
  region net 3V8: 28.4,78.8 28.4,84.2 33.4,84.2 33.4,78.8
  region: 40.076,63.6 40.076,63.811 37.3,65.1 37.3,66.8 43.1,66.8 43.1,65.1 40.323,63.811 40.323,63.6
  region net 3V3: 37.3,73.1 39.6,74 41.1,74 43.1,73.1 43.1,71.4 37.3,71.4
  region net 3V3: 41.1,73.5 39.6,73.5 39.6,79.5 41.1,79.5
  region net VIN: 13,32.1 13,38.1 16,38.1 16,32.1
L2:
  region net GND: 21.5,11 29.25,11 29.25,20 21.5,20

## Silkscreen, mask and mechanical layers (free items; w line width, h text height)
Top Overlay:
  lines w0.2: 1.5,47.75 2,47.25 3.286,47.25 4,46 ; 22.5,1 23.5,1 33.25,1 33.55,1.15 ; 22.5,4.5 29.75,4.5 33.5,4.5 33.664,4.582
  text "-" at 59,71.25 h10 r90
  text "+" at 114.5,70.5 h10
  text "-" at 119,52 h10 r90
  text "+" at 54.5,51.5 h10
  text "VOUT1 - 5V0 / VOUT2 - 3V8 / VOUT3 - 3V3" at 18,42 h1.52
  text "-" at 19.85,38.85 h1.52 r90
  text "CHARGER INSERTED / (ACTIVE HIGH)" at 25.75,34.5 h1.52
  text "FOR USB" at 23.5,33.75 h1.52 r90
  text "+" at 19,32.5 h1.52
  text "-" at 59,30 h10 r90
  text "+" at 114.5,29.25 h10
  text "-" at 119,10.75 h10 r90
  text "+" at 54.5,10.25 h10
  text "VIN - 5V0" at 12.5,3.25 h1.52
  text "MP2672A" at 12.5,1.25 h1.52
Bottom Overlay:
  drawing of 2 lines, arcs and shapes, not listed
Dimensions:
  lines w0.1: 0,0 0,0
Mechanical 13:
  lines w0.1: 0,0 0,69
  lines w0.2: 0,0 10,0 ; 110.95,64.67 127.25,64.75 ; 111.2,22.55 129.75,22.5 ; 119.75,74.25 119.75,55.12 120,32.13 120,13

## Text inside footprints (layer, text, board x,y; h text height)
C12: Top Overlay "+" at 15.63,17.879 h1.52 r270
C13: Top Overlay "+" at 46.379,22.87 h1.52 r180